# EAGLE board Rear_brake_lamp_v1 (EAGLE 7.3.0)
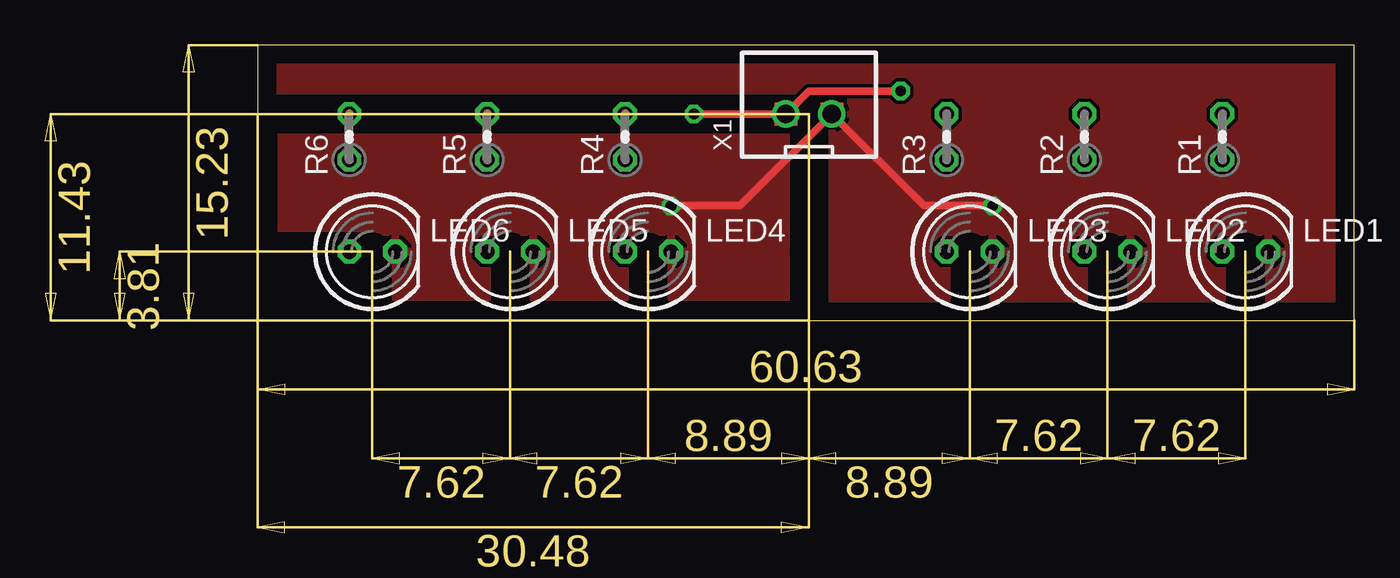
[diagram p0: board, top side]
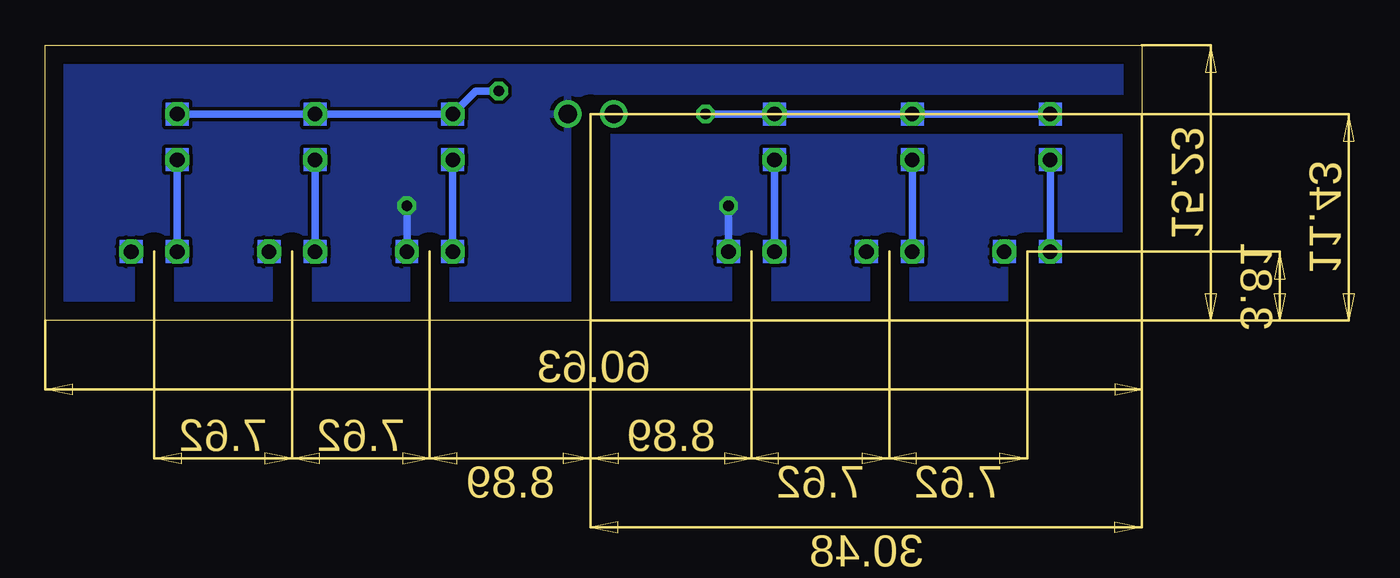
[diagram p1: board, bottom side, seen from below]

Size 60.63 x 15.23 mm. Coordinates in mm from the lower left corner, seen from the top.
Outline: 0,0 60.63,0 60.63,15.23 0,15.23 0,0
Copper layers (1*16): Top 0.035mm / dielectric 1.5mm / Bottom 0.035mm
Design rules "default": minimum track width 10mil, minimum drill 24mil, track to track 8mil, track to pad 8mil, pad to pad 8mil, via to via 8mil, smd to smd 8mil, copper to edge 40mil, drill to drill 8mil, minimum pad ring 10mil, minimum via ring 8mil, stop-mask expansion 4mil, vias tented up to drill 0mil, thermal gap 10mil

## Footprints (pad centres in the part's own frame; a part is rotated, then mirrored left to right if it is on the bottom)
LED5MM = drill 0.813 octagon: A -1.27,0; K 1.27,0
0204V = drill 0.813 octagon: 1 -1.27,0; 2 1.27,0
JST-XH-02-PACKAGE-ROUND-PAD = drill 1.016: 1 -1.27,0; 2 1.27,0

## Placement (x,y rotation side)
LED1  1.78 V  [LED5MM]  54.61,3.81 0 top
LED2  1.78 V  [LED5MM]  46.99,3.81 0 top
LED3  1.78 V  [LED5MM]  39.37,3.81 0 top
LED4  1.78 V  [LED5MM]  21.59,3.81 0 top
LED5  1.78 V  [LED5MM]  13.97,3.81 0 top
LED6  1.78 V  [LED5MM]  6.35,3.81 0 top
R1  680  [0204V]  53.34,10.16 90 top
R2  680  [0204V]  45.72,10.16 90 top
R3  680  [0204V]  38.1,10.16 90 top
R4  680  [0204V]  20.32,10.16 90 top
R5  680  [0204V]  12.7,10.16 90 top
R6  680  [0204V]  5.08,10.16 90 top
X1  JST-XH-02-PIN-ROUND-PAD  [JST-XH-02-PACKAGE-ROUND-PAD]  30.48,11.43 0 top

## Library data of the parts
LED1-LED6 = led; COLOR: Red; CURRENT: 0.32 mA
R1-R6 = resistor
X1 = Rembrandt Electronics - JST XH Connectors v1-0

## Nets
API_BRAKE: R1.2 R2.2 R3.2 R4.2 R5.2 R6.2 X1.1
GND: LED1.K LED2.K LED3.K LED4.K LED5.K LED6.K X1.2
N$1: LED1.A R1.1
N$2: LED2.A R2.1
N$3: LED3.A R3.1
N$4: LED4.A R4.1
N$5: LED5.A R5.1
N$6: LED6.A R6.1

## Tracks (layer width: path | path; a pad name or v marks a point on that pad's centre or on a via)
API_BRAKE  (via drill 0.6)
  Top 0.406: v24.13,11.43 X1.1 30.48,12.7 v35.56,12.7
  Bottom 0.406: v24.13,11.43 R4.2 R5.2 R6.2 | v35.56,12.7 36.83,12.7 R3.2 R2.2 R1.2
GND  (via drill 0.6)
  Top 0.406: v22.86,6.35 26.67,6.35 X1.2 36.83,6.35 v40.64,6.35
  Bottom 0.406: LED4.K v22.86,6.35 | LED3.K v40.64,6.35
  pour Top: 0,15.24 60.96,15.24 60.96,0 0,0
  pour Bottom: 0,15.24 60.96,15.24 60.96,0 0,0
N$1
  Bottom 0.406: R1.1 LED1.A
N$2
  Bottom 0.406: R2.1 LED2.A
N$3
  Bottom 0.406: R3.1 LED3.A
N$4
  Bottom 0.406: R4.1 LED4.A
N$5
  Bottom 0.406: R5.1 LED5.A
N$6
  Bottom 0.406: R6.1 LED6.A
(copper drawn outside any net)
  shapes: Bottom area x24, Top area x2